# Altium PCB DWS-2_Comutator.PcbDoc
Units mm, origin at the board's own origin, x right, y up, seen from the top; angles counter-clockwise.
Board outline 165 x 100 mm, 2 copper layers (Top Layer, Bottom Layer); 20 components, 22 nets, 87 pads, 1 vias.
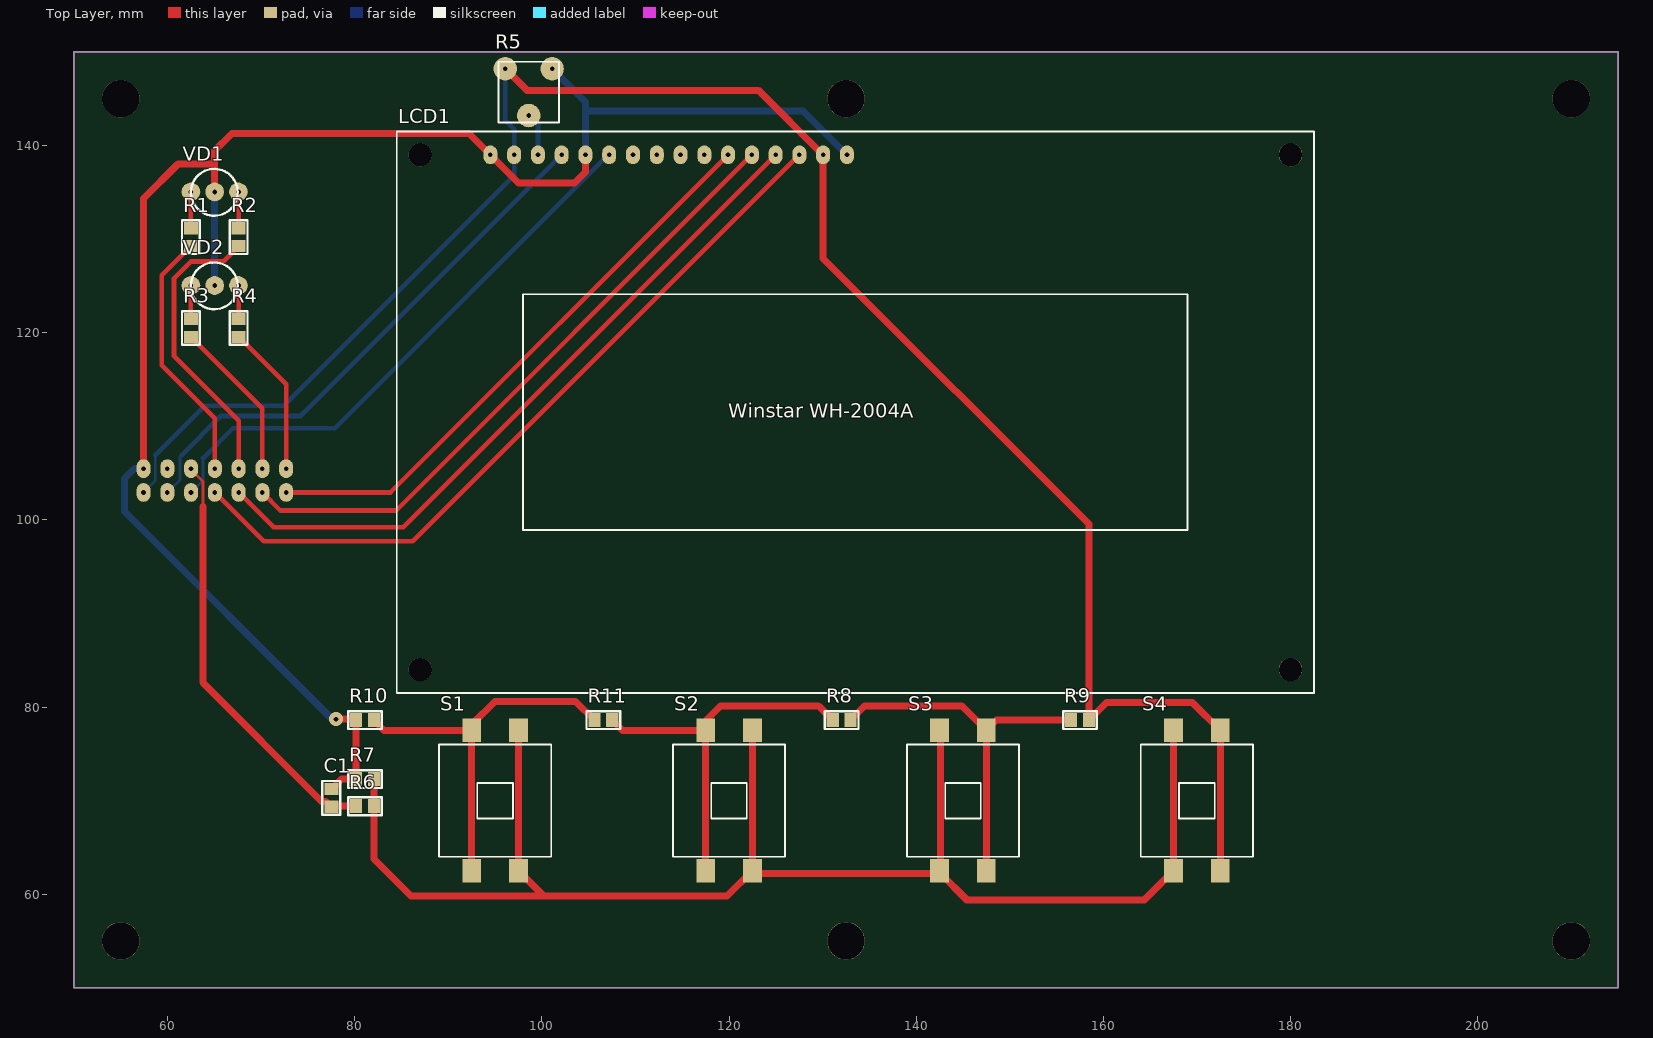
[diagram p0: Top Layer view]
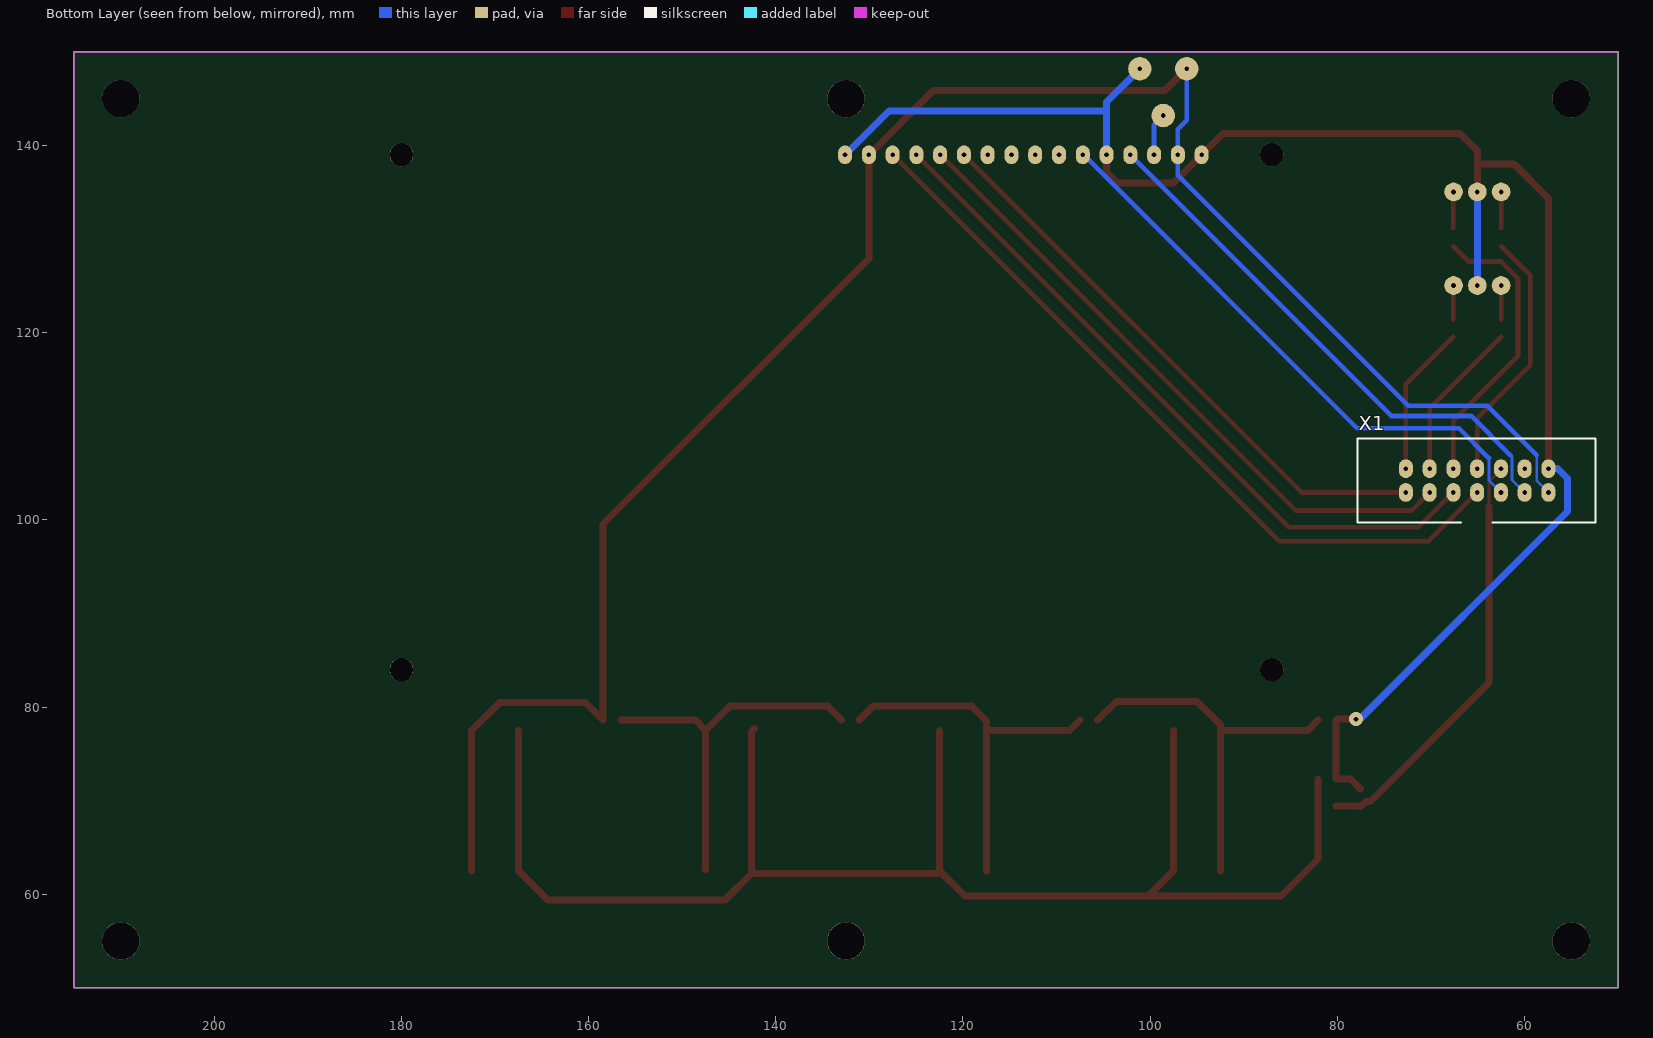
[diagram p1: Bottom Layer view, seen from below]

## Layer stack, top to bottom
Top Layer: signal copper 0.0356
Dielectric: dielectric 0.32, FR-4, Dk 4.8
Bottom Layer: signal copper 0.0356

## Board outline
50,50 50,150 215,150 215,50

## Design rules (kind name [scope] priority, off if disabled: settings)
Clearance "Clearance_GND_VCC +3.3" [InNet('GND') vs InNet('VCC +3.3')] p1 off: gap=0.2
Clearance Clearance_U3_Trace [(IsTrack  And IsNet)  And InRegion(3815,3770 ,4275 ,4280) vs (IsTrack  And IsNet)  And InRegion(3815,3770 ,4275 ,4280)] p2: gap=0.2
Clearance Clearance_QFP_NET [InNet('SPI_MISO/DO','SPI_MOSI/DI','GND','VCC','GDO2','GDO0','SPI_SS','SPI_SCK','NetC3_1','NetC2_1','GND','NetC1_2','NetANT1_1','NetR1_2')  And InRegion(3815,3770 ,4275 ,4280) vs InNet('SPI_MISO','SPI_MOSI','GND','VCC','GDO2','GDO0','SPI_SS','SPI_SCK','NetC3_1','NetC2_1','GND')  And InRegion(3815,3770 ,4275 ,4280)] p3: gap=0.2
Clearance Clearance_QFP_Pins [InComponent('U1') And IsPad] p4: gap=0.2
Clearance Clearance_GND [InPolygon] p5: gap=0.5
Clearance [All] p6: gap=0.3
ComponentClearance ComponentClearance_R1_C10 [InComponent('C10') vs InComponent('R1')] p1 off: gap=0 collisioncheckmode=3 verticalgap=0 showdistances=FALSE
ComponentClearance [All] p2 off: gap=0.3 collisioncheckmode=3 verticalgap=0.3 showdistances=FALSE
HoleSize [All] p1: absolutevalues=TRUE maxlimit=5 minlimit=0.3 maxpercent=80.000 minpercent=20.000
NetAntennae [All] p1: netantennaetolerance=50
PlaneConnect [All] p1: planeconnectstyle=Relief reliefexpansion=0.508 reliefentries=4 reliefconductorwidth=0.3 reliefairgap=0.3
PolygonConnect [All] p1: connectstyle=Relief reliefconductorwidth=0.5 reliefentries=4 polygonreliefangle="90 Angle"
RoutingCorners [All] p1: cornerstyle=45-Degree minsetback=2.54 maxsetback=5
RoutingVias [All] p1: holewidth=0.5 width=1.6 viastyle="Through Hole" minholewidth=0.3 minwidth=1 maxholewidth=1 maxwidth=2
ShortCircuit ShortCircuit_ANT1 [InComponent('ANT1')] p1: allowed=TRUE
ShortCircuit [All] p2: allowed=FALSE
SilkToSilkClearance [All] p1: silktosilkclearance=0.3
SilkscreenOverComponentPads [All] p1: minsilkscreentomaskgap=0.254
SolderMaskExpansion [All] p1: expansion=0.102
Width [All] p1: maxlimit=5 minlimit=0.2 preferedwidth=0.3
20 further rules are at their usual default settings.

## Components (designator, comment, footprint, x,y, rotation, side; value= is the part's Value field where it differs from the comment)
C1 "KONDENS_SMD" C0805 77.5,70.3 r270 top
LCD1 "WH2004A" WH2004A 133.5,111.5 r0 top
R1 "RES" C0805 62.5,130.2 r90 top
R2 "RES" C0805 67.6,130.2 r90 top
R3 "RES" C0805 62.5,120.5 r90 top
R4 "RES" C0805 67.6,120.5 r90 top
R5 "CA6V" CA6V 98.6,145.7 r180 top
R6 "RES" C0805 81.1,69.4 r180 top
R7 "RES" C0805 81.1,72.3 r0 top
R8 "RES" C0805 132.033,78.6 r0 top
R9 "RES" C0805 157.5,78.6 r0 top
R10 "RES" C0805 81.1,78.6 r0 top
R11 "RES" C0805 106.567,78.6 r0 top
S1 "DTSM81" DTSM81 95,70 r90 top locked
S2 "DTSM81" DTSM81 120,70 r90 top locked
S3 "DTSM81" DTSM81 145,70 r270 top
S4 "DTSM81" DTSM81 170,70 r270 top
VD1 "LIGHTDIODE2" LIGHTDIODE2 65,135 r180 top
VD2 "LIGHTDIODE2" LIGHTDIODE2 65,125 r180 top
X1 "IDC-14M" IDC-14M 65,104.2 r90 bottom

## Footprints (in the part's own frame and the unit in brackets; to place one, negate y for a bottom-side part, rotate by r counter-clockwise, add the part's x,y. Pads: shape width x height; smd on the part's side, far side on the other; paste and mask are expansions set on the pad)
C0805 [mm]
  rect 1.3x1.5 smd: 1(-0.95,0) 2(0.95,0)
  silkscreen extent -1.8,-0.95 1.8,0.95
CA6V [mm]
  round 2.5 hole 0.5: 1(-2.5,-2.5) 2(2.5,-2.5) 3(0,2.5)
  silkscreen extent -3.25,-3.25 3.25,3.25
DTSM81 [mm]
  rect 2.5x2 smd: 1(-7.5,2.5) 1(7.5,2.5) 2(-7.5,-2.5) 2(7.5,-2.5)
  silkscreen extent -6,-6 6,6
IDC-14M [mm]
  oval 2x1.5 hole 0.5: 1(-1.27,7.68) 2(1.27,7.68) 3(-1.27,5.14) 4(1.27,5.14) 5(-1.27,2.6) 6(1.27,2.6) 7(-1.27,0.06) 8(1.27,0.06) 9(-1.27,-2.48) 10(1.27,-2.48) 11(-1.27,-5.02) 12(1.27,-5.02) 13(-1.27,-7.56) 14(1.27,-7.56)
  silkscreen extent -4.5,-12.58 4.5,12.85
LIGHTDIODE2 [mm]
  round 2 hole 0.5: 1(-0.04,-0.04) 2(-2.58,-0.04) 3(2.5,-0.04)
  silkscreen extent -2.5,-2.5 2.5,2.5
WH2004A [mm]
  round 2.5 hole 2.5: 0(-46.5,-27.5) 0(-46.5,27.5) 0(46.5,-27.5) 2(46.5,27.5)
  oval 1.5x2 hole 0.5: 1(-39,27.5) 2(-36.46,27.5) 3(-33.92,27.5) 4(-31.38,27.5) 5(-28.84,27.5) 6(-26.3,27.5) 7(-23.76,27.5) 8(-21.22,27.5) 9(-18.68,27.5) 10(-16.14,27.5) 11(-13.6,27.5) 12(-11.06,27.5) 13(-8.52,27.5) 14(-5.98,27.5) 15(-3.44,27.5) 16(-0.9,27.5)
  silkscreen extent -49,-30 49,30

## Part data
R1 R2 R3 R4 R6 R7 R8 R9 R10 R11: "Resistor"
R5: library part Resistor_podstr

## Free pads (board coordinates)
  round 4 hole 4 unplated: 0(55,55) 1(55,145) 2(210,145) 3(132.5,145) 4(132.5,55) 5(210,55)

## Via types
v1: diameter 1.5, hole 0.5, Top Layer to Bottom Layer, 1 vias

## Nets (pads, with @x,y where several pads share a name; then routed paths per layer and width w, separated by ;. In a path a pad name is that pad's centre, name@x,y a point inside that pad or via, vN(x,y) a via of type N, cw(c..) or ccw(c..) an arc to the next point about the centre after c; other vN are vias at no path point)
DB4: LCD1.11 X1.1 | length 62.2
  Top Layer w0.5: X1.1 83.83,102.93 LCD1.11
DB5: LCD1.12 X1.3 | length 68.8
  Top Layer w0.5: X1.3 72.07,101 84.44,101 LCD1.12
DB6: LCD1.13 X1.5 | length 75.4
  Top Layer w0.5: X1.5 71.33,99.2 85.18,99.2 LCD1.13
DB7: LCD1.14 X1.7 | length 81.7
  Top Layer w0.5: X1.7 70.29,97.7 86.22,97.7 LCD1.14
E: LCD1.6 X1.9 | length 61
  Bottom Layer w0.3: X1.9 63.8,104.21 63.8,106.6
  Bottom Layer w0.5: 63.8,106.6 67,109.8 77.9,109.8 107.1,139 LCD1.6
GND: C1.1 LCD1.1 LCD1.5 LCD1.16 R5.1 R7.1 R10.1 VD1.1 VD2.1 X1.14 | length 187.3
  Top Layer w0.75: X1.14 57.44,134.34 61.1,138 65.04,138 ; VD1.1 65.04,138 ; C1.1 77.55,71.25 78.6,72.3 R7.1 R10.1 80.05,78.7 v1(78,78.7) ; LCD1.5 104.66,137.16 103.5,136 97.5,136 LCD1.1 92.2,141.3 66.9,141.3 65.04,139.44 65.04,138
  Bottom Layer w0.75: X1.14 56.47,105.47 55.4,104.4 55.4,100.9 77.5,78.8 78,78.8 v1(78,78.7) ; VD2.1 VD1.1 ; R5.1 104.66,144.64 104.66,143.7 ; LCD1.5 104.66,143.7 ; LCD1.16 127.9,143.7 104.66,143.7
NetC1_2: C1.2 R6.2 X1.10 | length 45.3
  Top Layer w0.3: X1.10 62.52,105.38 63.8,104.1 63.8,101.4
  Top Layer w0.75: 63.8,101.4 63.8,82.595 76.47,69.925 76.925,69.925 C1.2 77.55,69.4 R6.2
NetLCD1_3: LCD1.3 R5.3 | length 4.6
  Bottom Layer w0.5: R5.3 99.58,142.22 LCD1.3
NetR1_1: R1.1 X1.8 | length 27.4
  Top Layer w0.5: R1.1 59.4,126.15 59.4,116.5 65.06,110.84 X1.8
NetR1_2: R1.2 VD1.3 | length 3.9
  Top Layer w0.5: R1.2 VD1.3
NetR2_1: R2.1 X1.6 | length 31.5
  Top Layer w0.5: X1.6 67.6,110.6 60.7,117.5 60.7,125.8 62.5,127.6 65.95,127.6 R2.1
NetR2_2: R2.2 VD1.2 | length 3.9
  Top Layer w0.5: VD1.2 67.6,135.02 R2.2
NetR3_1: R3.1 X1.4 | length 17.2
  Top Layer w0.5: R3.1 70.14,111.91 X1.4
NetR3_2: R3.2 VD2.3 | length 3.6
  Top Layer w0.5: R3.2 VD2.3
NetR4_1: R4.1 X1.2 | length 16.2
  Top Layer w0.5: R4.1 72.68,114.47 X1.2
NetR4_2: R4.2 VD2.2 | length 3.6
  Top Layer w0.5: VD2.2 67.6,125.02 R4.2
NetR6_1: R6.1 R7.2 S1.2 S2.2 S3.2 S4.2 | length 163.8
  Top Layer w0.75: R7.2 R6.1 82.05,63.75 86,59.8 100.2,59.8 ; S1.2@97.5,77.5 97.5,62.5 100.2,59.8 ; S2.2@122.5,77.5 S2.2@122.5,62.5 ; S3.2@142.3,77.7 142.5,77.5 142.6,77.4 S3.2@142.6,62.2 ; S4.2@167.5,77.5 167.5,62.5 164.4,59.4 145.4,59.4 S3.2@142.6,62.2 ; 100.2,59.8 119.8,59.8 S2.2@122.5,62.5 ; S2.2@122.5,62.5 122.8,62.2 S3.2@142.6,62.2
NetR8_1: R8.1 R11.2 S2.1 | length 41.3
  Top Layer w0.75: R11.2 108.617,77.5 S2.1@117.5,77.5 ; S2.1@117.5,62.5 S2.1@117.5,77.5 ; R8.1 129.583,80.1 119.1,80.1 117.5,78.5 S2.1@117.5,77.5
NetR8_2: R8.2 R9.1 S3.1 | length 40.6
  Top Layer w0.75: R8.2 134.483,80.1 144.9,80.1 S3.1@147.5,77.5 ; S3.1@147.5,62.6 S3.1@147.5,77.5 ; R9.1 148.6,78.6 S3.1@147.5,77.5
NetR10_2: R10.2 R11.1 S1.1 | length 41.5
  Top Layer w0.75: R10.2 83.15,77.5 S1.1@92.5,77.5 ; S1.1@92.5,62.5 S1.1@92.5,77.5 ; R11.1 103.617,80.6 95,80.6 92.5,78.1 S1.1@92.5,77.5
RS: LCD1.4 X1.11 | length 58.5
  Bottom Layer w0.3: X1.11 61.32,104.27 61.32,106.72 61.5,106.9
  Bottom Layer w0.5: 61.5,106.9 65.7,111.1 74.22,111.1 LCD1.4
VCC: LCD1.2@97.04,139 LCD1.15 R5.2 R9.2 S4.1 X1.13 | length 208
  Top Layer w0.75: R5.2 98.4,145.9 123.16,145.9 LCD1.15 130.06,127.94 158.45,99.55 R9.2 160.35,80.5 169.5,80.5 172.5,77.5 S4.1@172.5,62.5
  Bottom Layer w0.3: X1.13 58.7,104.19 58.7,106.9
  Bottom Layer w0.5: 58.7,106.9 64,112.2 72.4,112.2 97.04,136.84 97.04,139 97.04,141.76 96.1,142.7 R5.2
pads on no net: LCD1.0 LCD1.2@180,139 LCD1.7 LCD1.8 LCD1.9 LCD1.10 X1.12

## Keep-outs
Keep-Out Layer:
  the board outline again, w0.2

## Text inside footprints (layer, text, board x,y; h text height)
LCD1: Top Overlay "Winstar WH-2004A" at 119.9,110.9 h1.52